# EAGLE board EGB320 (EAGLE 8.3.0)
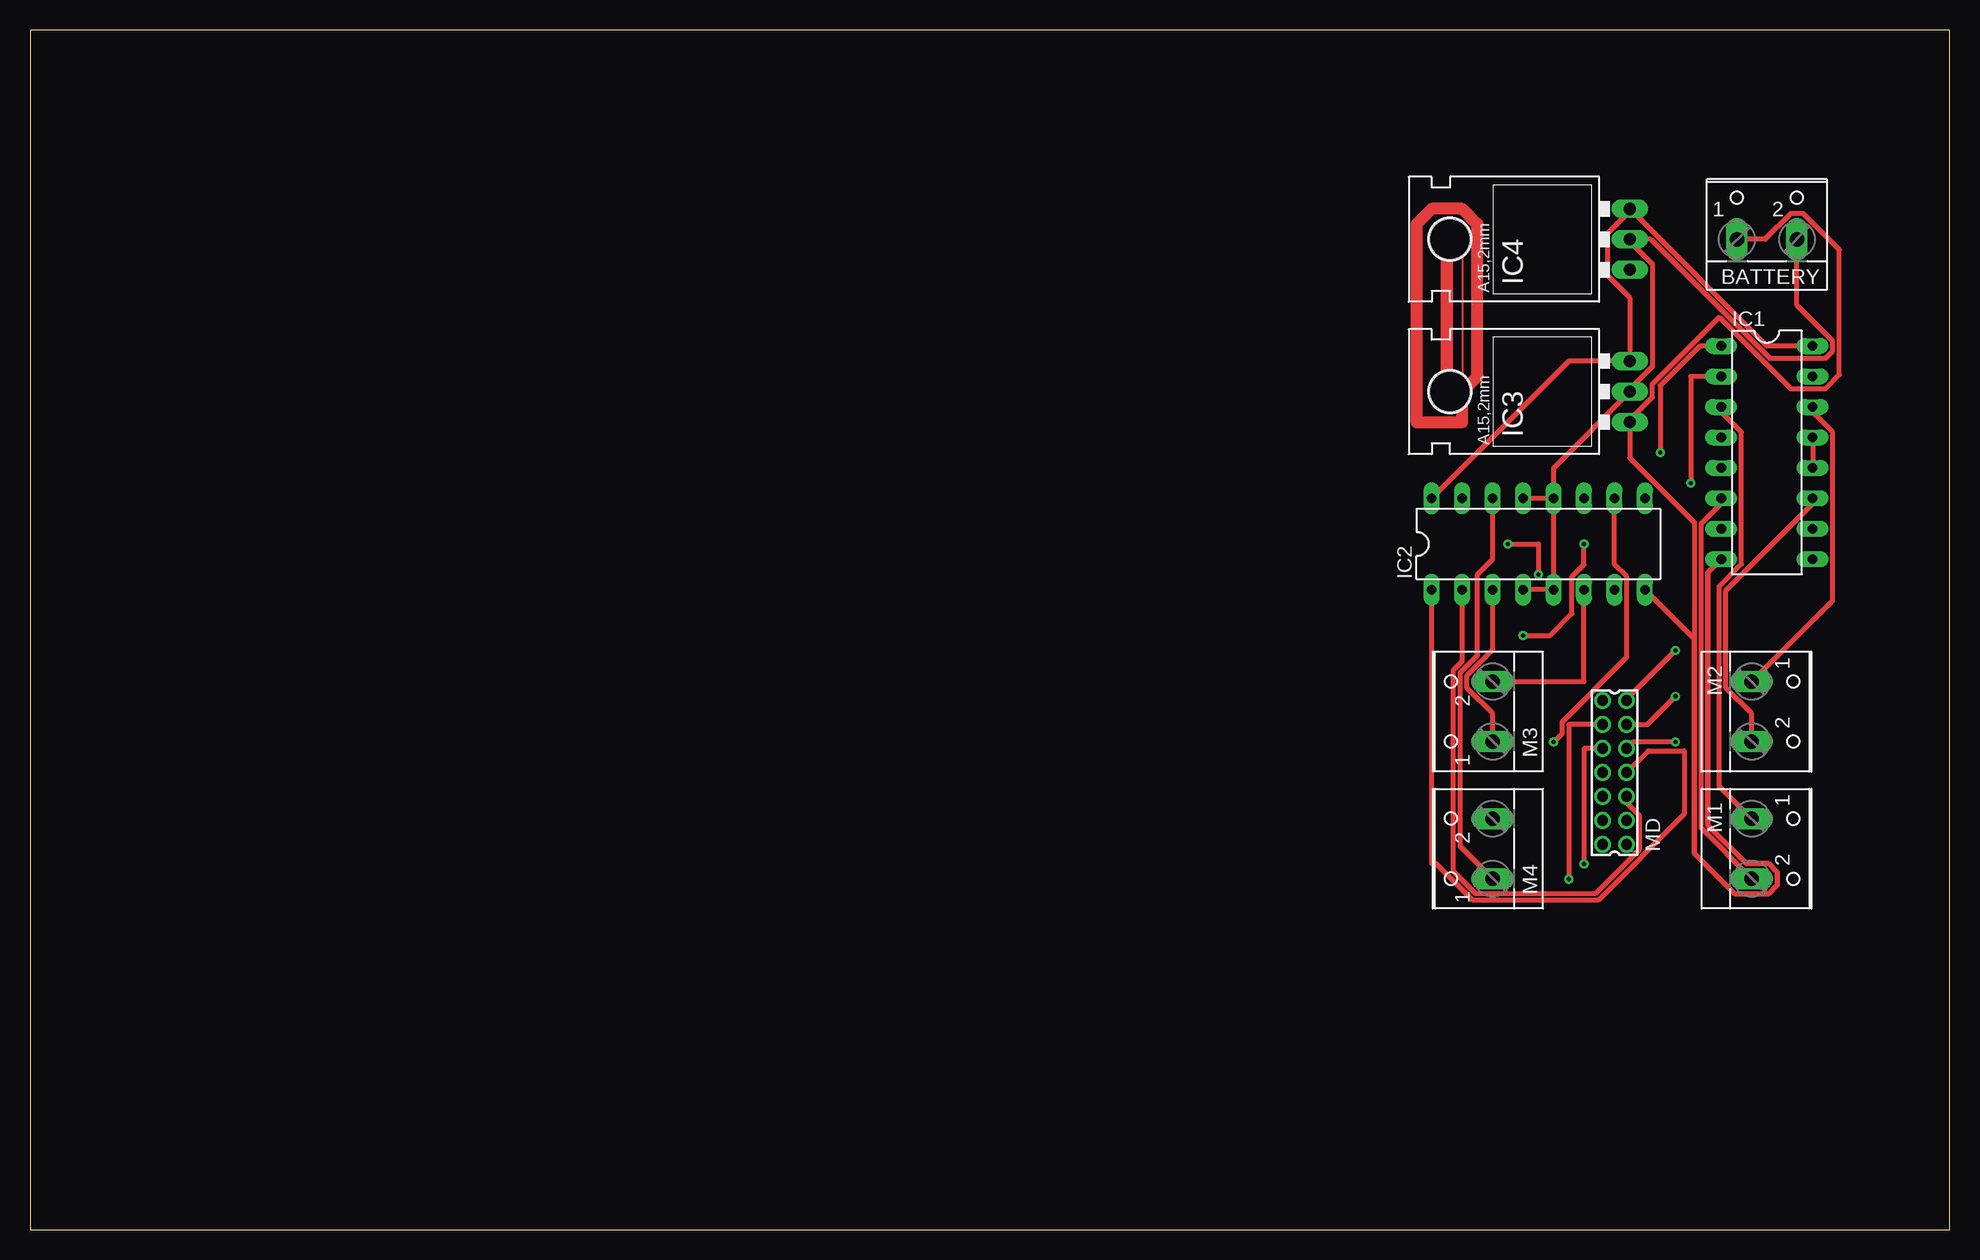
[diagram p0: board, top side]
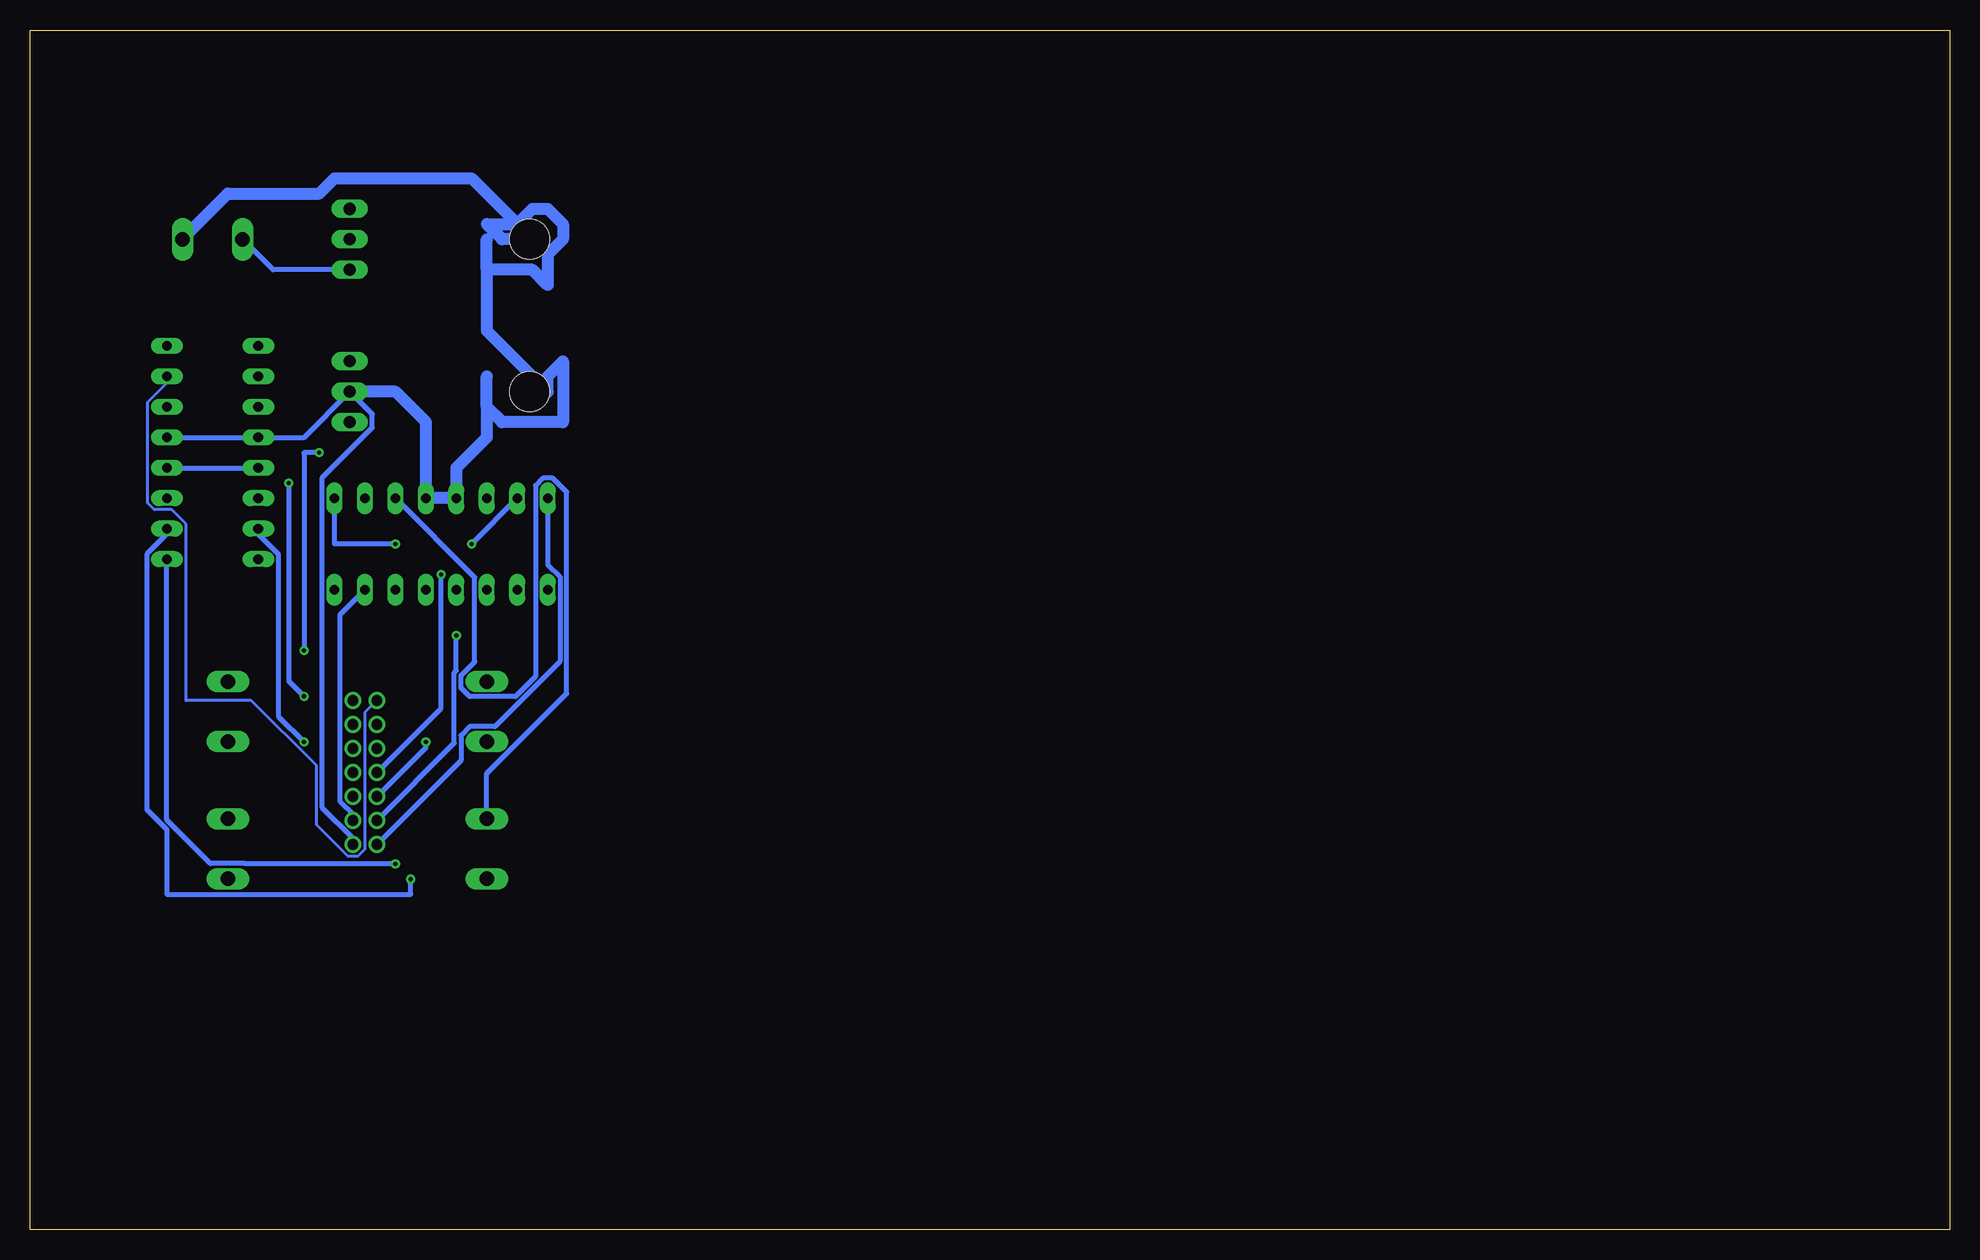
[diagram p1: board, bottom side, seen from below]

Size 160 x 100 mm. Coordinates in mm from the lower left corner, seen from the top.
Outline: 0,0 160,0 160,100 0,100 0,0
Copper layers (1*16): Top 0.035mm / dielectric 1.5mm / Bottom 0.035mm
Design rules "default": minimum track width 6mil, minimum drill 0.35mm, track to track 6mil, track to pad 6mil, pad to pad 6mil, via to via 6mil, smd to smd 6mil, copper to edge 40mil, drill to drill 6mil, minimum pad ring 10mil, minimum via ring 8mil, stop-mask expansion 4mil, vias tented up to drill 0mil, thermal gap 10mil

## Footprints (pad centres in the part's own frame; a part is rotated, then mirrored left to right if it is on the bottom)
W237-102 = drill 1.194 long: 1 -2.5,-1.27; 2 2.5,-1.27
DIL16 = drill 0.813 long: 1 -8.89,-3.81; 2 -6.35,-3.81; 3 -3.81,-3.81; 4 -1.27,-3.81; 5 1.27,-3.81; 6 3.81,-3.81; 7 6.35,-3.81; 8 8.89,-3.81; 9 8.89,3.81; 10 6.35,3.81; 11 3.81,3.81; 12 1.27,3.81; 13 -1.27,3.81; 14 -3.81,3.81; 15 -6.35,3.81; 16 -8.89,3.81
78XXL = drill 1.016 long: GND 0,-3.81; IN -2.54,-3.81; OUT 2.54,-3.81 | hole 3.302: 0,11.176
87758-1416 = drill 0.9 pad 1.27: 1 -6,-1; 2 -6,1; 3 -4,-1; 4 -4,1; 5 -2,-1; 6 -2,1; 7 0,-1; 8 0,1; 9 2,-1; 10 2,1; 11 4,-1; 12 4,1; 13 6,-1; 14 6,1

## Placement (x,y rotation side)
BATTERY  [W237-102]  144.78,83.82 0 top
IC1  L293D  [DIL16]  144.78,64.77 270 top
IC2  L293D  [DIL16]  125.73,57.15 0 top
IC3  [78XXL]  129.54,69.85 90 top
IC4  [78XXL]  129.54,82.55 90 top
M1  [W237-102]  144.78,31.75 270 top
M2  [W237-102]  144.78,43.18 270 top
M3  [W237-102]  120.65,43.18 90 top
M4  [W237-102]  120.65,31.75 90 top
MD  87758-1416  [87758-1416]  132.08,38.1 90 top

## Library data of the parts
BATTERY M1-M4 = con-wago-500; MPN: 237-102; OC_FARNELL: unknown; OC_NEWARK: 70K9898
IC1 IC2 = st-microelectronics; MPN: L293D; OC_FARNELL: 9589619; OC_NEWARK: 56P8249
IC3 IC4 = v-reg
MD = con-molex; MF: MOLEX; MPN: 87758-1416; OC_FARNELL: 7472358; OC_NEWARK: 59J1562

## Nets
N$2: IC1.2 MD.11
N$3: IC1.16 IC2.16 IC3.OUT IC4.OUT MD.2
N$4: IC1.1 MD.13
N$5: BATTERY.1 IC1.8 IC2.8 IC3.IN IC4.IN
N$6: IC1.3 M1.1
N$7: IC1.6 M1.2
N$8: IC1.14 M2.1
N$9: IC1.11 M2.2
N$10: IC2.14 M4.1
N$11: IC2.11 M4.2
N$12: IC2.6 M3.2
N$13: IC2.3 M3.1
N$14: IC1.10 MD.12
N$15: IC1.9 MD.10
N$16: IC1.15 MD.14
N$17: IC2.15 MD.8
N$18: IC2.10 MD.6
N$19: IC2.9 MD.4
N$20: IC1.7 MD.9
N$21: IC2.1 MD.7
N$22: IC2.2 MD.5
N$23: IC2.7 MD.3
N$25: BATTERY.2 IC1.4 IC1.5 IC1.12 IC1.13 IC2.4 IC2.5 IC2.12 IC2.13 IC3.GND IC4.GND MD.1

## Tracks (layer width: path | path; a pad name or v marks a point on that pad's centre or on a via)
N$2  (via drill 0.35)
  Top 0.406: IC1.2 138.43,71.12 v138.43,62.23 | MD.11 134.81,42.1 v137.16,44.45
  Bottom 0.406: v138.43,62.23 138.43,45.72 v137.16,44.45
N$3
  Top 0.406: IC1.16 144.78,73.66 IC4.OUT 133.35,84.89 131.47,83.01 131.47,79.55 133.35,77.67 IC3.OUT 128.27,72.39 IC2.16
  Bottom 0.406: IC2.16 116.84,55.44 115.82,54.42 115.82,47.36 121.25,41.93 123.33,41.93 124.07,41.2 124.07,39.11 MD.2
N$4  (via drill 0.35)
  Top 0.406: IC1.1 139.19,73.66 135.89,70.36 v135.89,64.77 | MD.13 133.08,44.18 v137.16,48.26
  Bottom 0.406: v135.89,64.77 137.16,64.77 v137.16,48.26
N$5
  Top 0.406: BATTERY.1 144.62,82.55 146.76,84.7 147.8,84.7 150.82,81.67 150.82,71.26 149.67,70.1 146.75,70.1 140.8,76.06 135.23,70.49 135.23,69.39 133.35,67.51 IC3.IN 133.35,64.33 138.74,58.94 138.74,31.36 | 142.1,28 144.92,28 | 144.92,28 145.66,28.73 | 145.66,28.73 145.66,29.77 | 145.66,29.77 144.92,30.5 | 144.92,30.5 143.05,30.5 | 143.05,30.5 139.85,33.7 | 139.85,33.7 139.85,54.76 | 139.85,54.76 IC1.8 139.85,54.76 | 138.74,31.36 142.1,28 | 139.85,33.7 143.05,30.5 | 143.05,30.5 144.92,30.5 | 144.92,30.5 145.66,29.77 | 145.66,29.77 145.66,28.73 | 145.66,28.73 144.92,28 | 144.92,28 142.1,28 | 139.85,54.76 139.85,33.7 | IC2.8 138.74,49.23 138.74,31.36 | 142.1,28 138.74,31.36
  Bottom 0.406: IC4.IN 139.74,80.01 BATTERY.1
N$6
  Top 0.406: IC1.3 140.97,68.14 142.65,66.46 142.65,55.46 140.81,53.62 140.81,36.95 M1.1
N$7
  Top 0.406: IC1.6 140.97,60.52 139.29,58.84 139.29,33.47 M1.2
N$8
  Top 0.406: IC1.14 148.59,68.14 150.27,66.46 150.27,52.44 M2.1
N$9
  Top 0.406: IC1.11 148.59,60.52 141.36,53.29 141.36,45.16 143.51,43.02 M2.2
N$10
  Top 0.406: M4.1 119.22,31.95 119.22,46.43 120.65,47.87 120.65,54.61 121.92,55.88 IC2.14
N$11
  Bottom 0.406: IC2.11 122.94,54.36 122.94,47.33 124.07,46.2 124.07,45.16 123.33,44.43 119.54,44.43 117.86,46.11 117.86,62.04 117.26,62.64 116.42,62.64 115.27,61.48 115.27,44.67 121.92,38.02 M4.2
N$12
  Top 0.406: M3.2 129.54,45.68 IC2.6
N$13
  Top 0.406: M3.1 121.92,43.02 119.77,45.16 119.77,46.2 121.92,48.34 IC2.3
N$14  (via drill 0.35)
  Top 0.406: MD.12 128.27,42.1 v128.27,29.21
  Bottom 0.406: IC1.10 148.59,57.98 150.27,56.3 150.27,35.01 148.59,33.34 148.59,27.94 128.27,27.94 v128.27,29.21
N$15  (via drill 0.35)
  Top 0.406: MD.10 129.54,40.1 v129.54,30.48
  Bottom 0.406: v129.54,30.48 142.08,30.48 142.1,30.5 144.97,30.5 148.59,34.13 IC1.9
N$16
  Bottom 0.254: IC1.15 148.59,70.57 150.19,68.97 150.19,60.57 149.64,60.02 148.2,60.02 146.99,58.81 146.99,44.1 141.55,44.1 136.12,38.67 136.12,33.75 133.49,31.12 132.67,31.12 132.1,31.69 132.1,43.08 MD.14
N$17  (via drill 0.35)
  Top 0.406: v123.19,57.15 125.73,57.15 v125.73,54.61
  Bottom 0.406: IC2.15 v123.19,57.15 | MD.8 125.73,43.45 v125.73,54.61
N$18  (via drill 0.35)
  Top 0.406: v127,40.64 127.71,41.35 127.71,42.33 133.1,47.72 133.1,54.42 132.08,55.44 IC2.10
  Bottom 0.254: MD.6 | MD.6 131.08,35.88 MD.6
  Bottom 0.406: MD.6 127,40.18 v127,40.64
N$19  (via drill 0.35)
  Top 0.406: v124.46,49.53 126.71,49.53 128.52,51.34 128.52,54.42 129.54,55.44 v129.54,57.15
  Bottom 0.406: v124.46,49.53 124.46,46.59 124.62,46.43 124.62,40.55 MD.4 | v129.54,57.15 134.62,57.15 IC2.9
N$20  (via drill 0.35)
  Top 0.406: v137.16,40.64 133.62,40.64 MD.9
  Bottom 0.406: IC1.7 140.97,57.98 139.29,56.3 139.29,42.77 v137.16,40.64
N$21
  Top 0.406: MD.7 134.89,39.91 137.89,39.91 137.89,34.62 130.71,27.44 120.28,27.44 117.23,30.48 116.84,30.48 IC2.1
N$22
  Top 0.406: IC2.2 119.38,47.38 118.66,46.66 118.66,29.85 120.51,28 130.48,28 134.14,31.66 134.14,34.54 133.08,35.6 MD.5
N$23
  Bottom 0.406: MD.3 133.08,34.6 134.14,35.66 134.14,51.28 IC2.7
N$24
  Top 0.152: 119.38,81.28 119.38,71.12 118.11,69.85
  Top 1.016: 118.11,82.55 118.11,69.85 119.38,69.85 | 119.38,69.85 119.38,67.31 115.57,67.31 115.57,83.82 116.84,85.09 119.38,85.09 120.65,83.82 120.65,71.12 119.38,69.85 | 119.38,69.85 118.11,68.58 118.11,81.28 119.38,82.55
N$25
  Top 0.406: BATTERY.2 147.28,77.07 150.27,74.08 150.27,73.24 149.67,72.64 145.01,72.64 135.1,82.55 IC4.GND 133.35,82.35 135.23,80.47 135.23,71.93 133.35,70.05 IC3.GND 127,63.5 IC2.12 | 126.8,53.34 IC2.4 | 126.8,53.34 IC2.5 | IC2.12 127,53.54 126.8,53.34 | IC2.13 IC2.12 | IC1.13 IC1.12
  Top 1.016: IC2.13
  Bottom 0.406: MD.1 133.08,32.6 135.64,35.16 135.64,62.68 131.47,66.85 131.47,67.97 IC3.GND 137.16,66.04 IC1.4 IC1.13 | IC1.12 IC1.5
  Bottom 1.016: 147.32,82.55 143.51,86.36 135.89,86.36 134.62,87.63 123.19,87.63 118.11,82.55 120.65,82.55 121.92,83.82 119.38,83.82 118.11,85.09 116.84,85.09 115.57,83.82 115.57,82.55 116.84,81.28 116.84,78.74 118.11,80.01 121.92,80.01 | 121.92,80.01 121.92,82.55 | 121.92,80.01 121.92,74.93 116.84,69.85 116.84,71.12 115.57,72.39 115.57,67.31 120.65,67.31 121.92,68.58 | 121.92,68.58 121.92,71.12 | 121.92,68.58 121.92,66.04 124.46,63.5 IC2.13 IC2.12 127,67.31 129.54,69.85 IC3.GND